# EAGLE board d150_zm1000_socket (EAGLE 6.1)
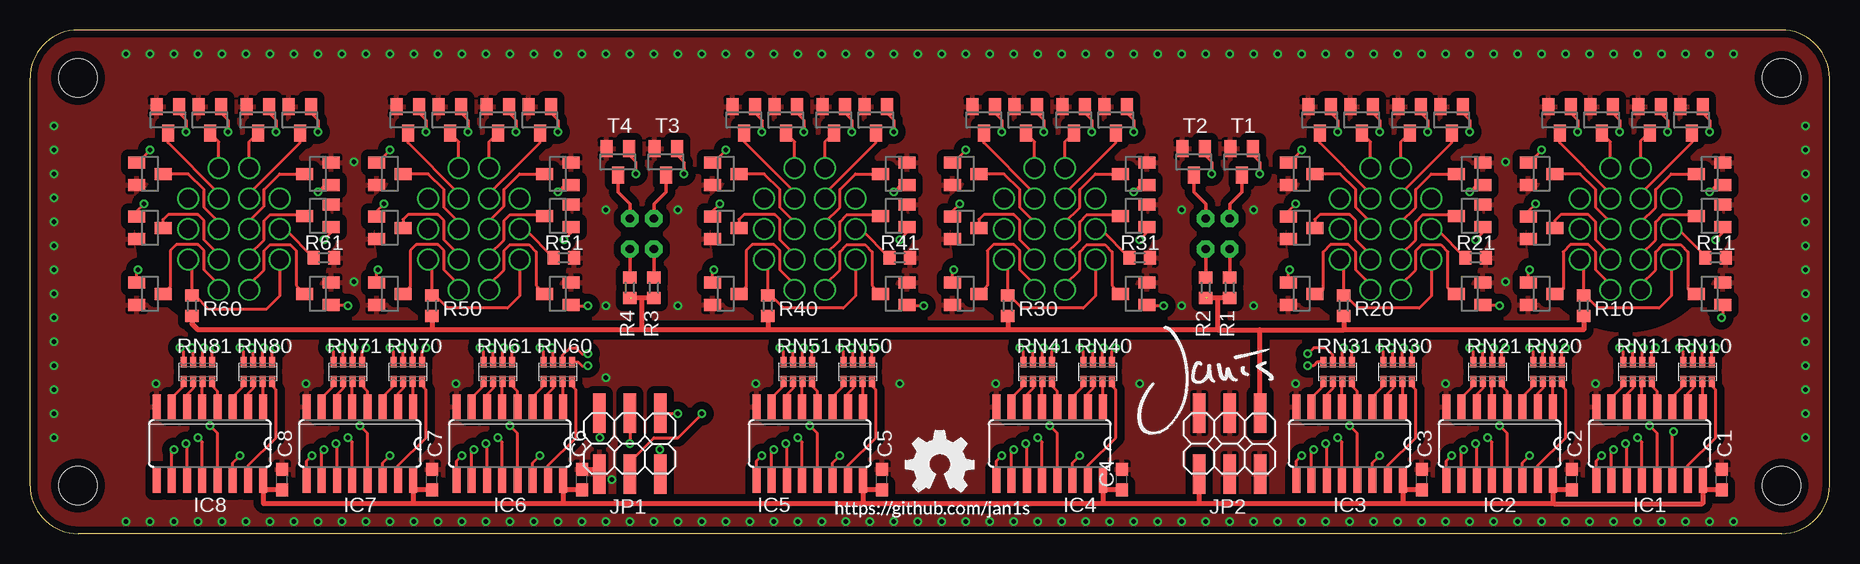
[diagram p0: board, top side]
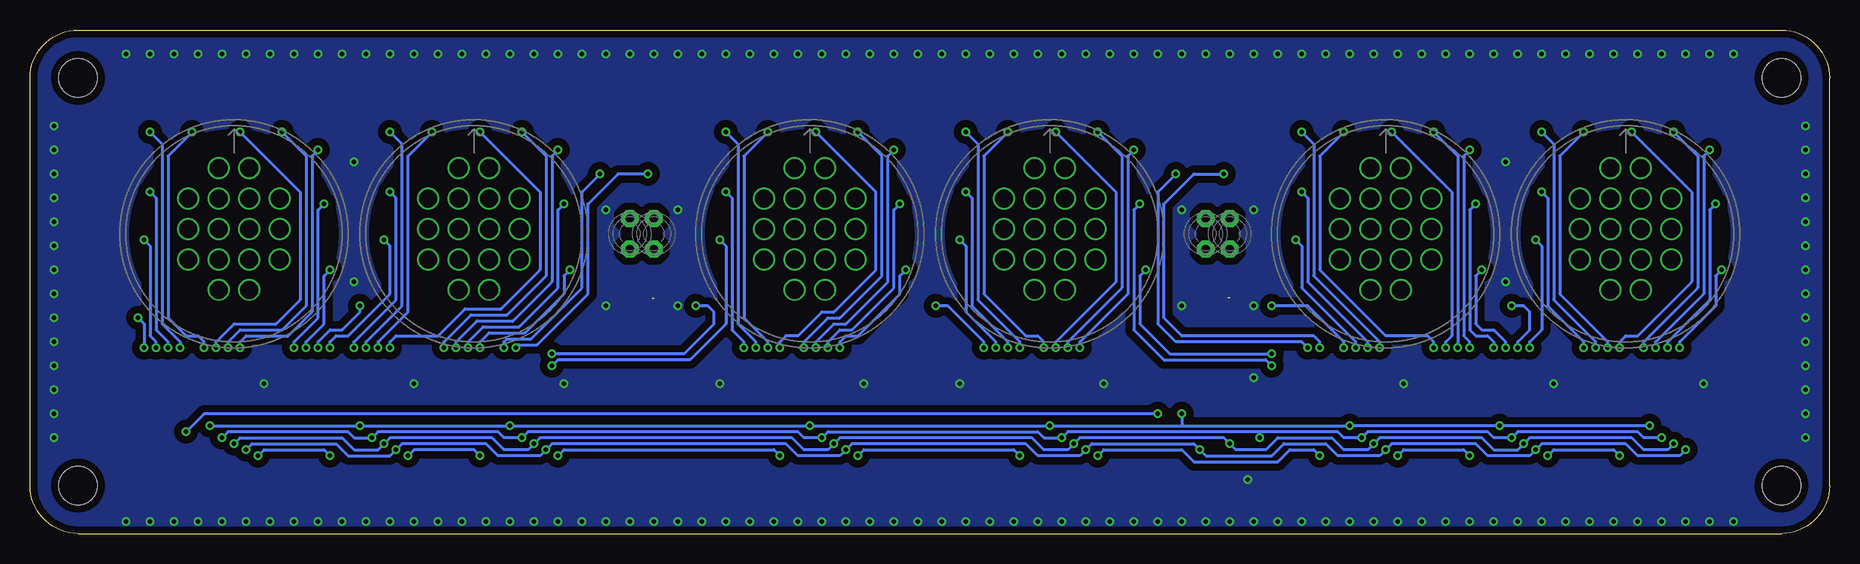
[diagram p1: board, bottom side, seen from below]

Size 150 x 42 mm. Coordinates in mm from the lower left corner, seen from the top.
Outline: 146,0 4,0 arc-90 0,4 0,38 arc-90 4,42 146,42 arc-90 150,38 150,4 arc-90 146,0
Copper layers (1*16): Top 0.035mm / dielectric 1.5mm / Bottom 0.035mm
Design rules: minimum track width 6mil, minimum drill 12mil, track to track 6mil, track to pad 6mil, pad to pad 6mil, via to via 6mil, smd to smd 0mil, copper to edge 10mil, drill to drill 10mil, minimum pad ring 6mil, minimum via ring 6mil, stop-mask expansion 2mil, vias tented up to drill 100mil, thermal gap 10mil
Holes 3.2 mm at 146,4 146,38 4,38 4,4
tRestrict: area 57.5,17.5 to 72.5,32.5; area 77.5,17.5 to 92.5,32.5; area 105.5,17.5 to 120.5,32.5; area 125.5,17.5 to 140.5,32.5; area 29.5,17.5 to 44.5,32.5; area 9.5,17.5 to 24.5,32.5
bRestrict: area 57,17 to 73,33; area 77,17 to 93,33; area 105,17 to 121,33; area 125,17 to 141,33; area 29,17 to 45,33; area 9,17 to 25,33

## Footprints (pad centres in the part's own frame; a part is rotated, then mirrored left to right if it is on the bottom)
C0603 = smd 1.1 x 1: 1 -0.85,0; 2 0.85,0
NE2-NEON-BULB-DRILL = drill 0.7 pad 1.422 octagon: 1 0,1.27; 2 0,-1.27
SO16 = smd 0.66 x 2.032: 1 -4.445,-3.073; 2 -3.175,-3.073; 3 -1.905,-3.073; 4 -0.635,-3.073; 5 0.635,-3.073; 6 1.905,-3.073; 7 3.175,-3.073; 8 4.445,-3.073; 9 4.445,3.073; 10 3.175,3.073; 11 1.905,3.073; 12 0.635,3.073; 13 -0.635,3.073; 14 -1.905,3.073; 15 -3.175,3.073; 16 -4.445,3.073
2X03SMD = smd 1.016 x 3.302: 1 -2.54,-2.54; 2 -2.54,2.54; 3 0,-2.54; 4 0,2.54; 5 2.54,-2.54; 6 2.54,2.54
ZM1000-SOCKETED = drill 1.5 pad 1.8: A1 -3.81,-2.14; A2 3.81,-2.14; IC1 -3.81,2.94; IC2 3.81,2.94; K0 1.27,0.4; K1 -1.27,5.48; K2 -1.27,2.94; K3 -1.27,0.4; K4 -1.27,-2.14; K5 -1.27,-4.68; K6 1.27,-4.68; K7 1.27,-2.14; K8 1.27,5.48; K9 1.27,2.94; KDP 3.81,0.4; PR -3.81,0.4
R0603 = smd 1 x 1.1: 1 -0.85,0; 2 0.85,0
CTS742C083 = smd 0.5 x 0.9: 1 -1.2,-0.8; 2 -0.4,-0.8; 3 0.4,-0.8; 4 1.2,-0.8; 5 1.2,0.8; 6 0.4,0.8; 7 -0.4,0.8; 8 -1.2,0.8
SOT23 = smd 1 x 1.4: 1 -0.95,-1.1; 2 0.95,-1.1; 3 0,1.1

## Placement (x,y rotation side)
C1  [C0603]  141,4.5 90 top
C2  [C0603]  128.5,4.5 90 top
C3  [C0603]  116,4.5 90 top
C4  [C0603]  91,4.5 90 top
C5  [C0603]  71,4.5 90 top
C6  [C0603]  46,4.5 90 top
C7  [C0603]  33.5,4.5 90 top
C8  [C0603]  21,4.5 90 top
GL1  [NE2-NEON-BULB-DRILL]  100,25 180 bottom
GL2  [NE2-NEON-BULB-DRILL]  98,25 180 bottom
GL3  [NE2-NEON-BULB-DRILL]  52,25 180 bottom
GL4  [NE2-NEON-BULB-DRILL]  50,25 180 bottom
IC1  74HC595D  [SO16]  135,7.5 180 top
IC2  74HC595D  [SO16]  122.5,7.5 180 top
IC3  74HC595D  [SO16]  110,7.5 180 top
IC4  74HC595D  [SO16]  85,7.5 180 top
IC5  74HC595D  [SO16]  65,7.5 180 top
IC6  74HC595D  [SO16]  40,7.5 180 top
IC7  74HC595D  [SO16]  27.5,7.5 180 top
IC8  74HC595D  [SO16]  15,7.5 180 top
JP1  [2X03SMD]  50,7.5 180 top
JP2  [2X03SMD]  100,7.5 180 top
N1  ZM1000-SOCKETED  [ZM1000-SOCKETED]  133,25 0 bottom
N2  ZM1000-SOCKETED  [ZM1000-SOCKETED]  113,25 0 bottom
N3  ZM1000-SOCKETED  [ZM1000-SOCKETED]  85,25 0 bottom
N4  ZM1000-SOCKETED  [ZM1000-SOCKETED]  65,25 0 bottom
N5  ZM1000-SOCKETED  [ZM1000-SOCKETED]  37,25 0 bottom
N6  ZM1000-SOCKETED  [ZM1000-SOCKETED]  17,25 0 bottom
R1  [R0603]  100,20.5 270 top
R2  [R0603]  98,20.5 270 top
R3  [R0603]  52,20.5 270 top
R4  [R0603]  50,20.5 270 top
R10  [R0603]  129.5,19 270 top
R11  [R0603]  140.5,23 180 top
R20  [R0603]  109.5,19 270 top
R21  [R0603]  120.5,23 180 top
R30  [R0603]  81.5,19 270 top
R31  [R0603]  92.5,23 180 top
R40  [R0603]  61.5,19 270 top
R41  [R0603]  72.5,23 180 top
R50  [R0603]  33.5,19 270 top
R51  [R0603]  44.5,23 180 top
R60  [R0603]  13.5,19 270 top
R61  [R0603]  24.5,23 180 top
RN10  10k  [CTS742C083]  139,13.5 0 top
RN11  10k  [CTS742C083]  134,13.5 0 top
RN20  10k  [CTS742C083]  126.5,13.5 0 top
RN21  10k  [CTS742C083]  121.5,13.5 0 top
RN30  10k  [CTS742C083]  114,13.5 0 top
RN31  10k  [CTS742C083]  109,13.5 0 top
RN40  10k  [CTS742C083]  89,13.5 0 top
RN41  10k  [CTS742C083]  84,13.5 0 top
RN50  10k  [CTS742C083]  69,13.5 0 top
RN51  10k  [CTS742C083]  64,13.5 0 top
RN60  10k  [CTS742C083]  44,13.5 0 top
RN61  10k  [CTS742C083]  39,13.5 0 top
RN70  10k  [CTS742C083]  31.5,13.5 0 top
RN71  10k  [CTS742C083]  26.5,13.5 0 top
RN80  10k  [CTS742C083]  19,13.5 0 top
RN81  10k  [CTS742C083]  14,13.5 0 top
T1  [SOT23]  101,31 180 top
T2  [SOT23]  97,31 180 top
T3  [SOT23]  53,31 180 top
T4  [SOT23]  49,31 180 top
T10  [SOT23]  126,30 270 top
T11  [SOT23]  135,34.5 180 top
T12  [SOT23]  138.5,34.5 180 top
T13  [SOT23]  140,30 90 top
T14  [SOT23]  140,26.5 90 top
T15  [SOT23]  140,20 90 top
T16  [SOT23]  126,20 270 top
T17  [SOT23]  126,25.5 270 top
T18  [SOT23]  131,34.5 180 top
T19  [SOT23]  127.5,34.5 180 top
T20  [SOT23]  106,30 270 top
T21  [SOT23]  115,34.5 180 top
T22  [SOT23]  118.5,34.5 180 top
T23  [SOT23]  120,30 90 top
T24  [SOT23]  120,26.5 90 top
T25  [SOT23]  120,20 90 top
T26  [SOT23]  106,20 270 top
T27  [SOT23]  106,25.5 270 top
T28  [SOT23]  111,34.5 180 top
T29  [SOT23]  107.5,34.5 180 top
T30  [SOT23]  78,30 270 top
T31  [SOT23]  87,34.5 180 top
T32  [SOT23]  90.5,34.5 180 top
T33  [SOT23]  92,30 90 top
T34  [SOT23]  92,26.5 90 top
T35  [SOT23]  92,20 90 top
T36  [SOT23]  78,20 270 top
T37  [SOT23]  78,25.5 270 top
T38  [SOT23]  83,34.5 180 top
T39  [SOT23]  79.5,34.5 180 top
T40  [SOT23]  58,30 270 top
T41  [SOT23]  67,34.5 180 top
T42  [SOT23]  70.5,34.5 180 top
T43  [SOT23]  72,30 90 top
T44  [SOT23]  72,26.5 90 top
T45  [SOT23]  72,20 90 top
T46  [SOT23]  58,20 270 top
T47  [SOT23]  58,25.5 270 top
T48  [SOT23]  63,34.5 180 top
T49  [SOT23]  59.5,34.5 180 top
T50  [SOT23]  30,30 270 top
T51  [SOT23]  39,34.5 180 top
T52  [SOT23]  42.5,34.5 180 top
T53  [SOT23]  44,30 90 top
T54  [SOT23]  44,26.5 90 top
T55  [SOT23]  44,20 90 top
T56  [SOT23]  30,20 270 top
T57  [SOT23]  30,25.5 270 top
T58  [SOT23]  35,34.5 180 top
T59  [SOT23]  31.5,34.5 180 top
T60  [SOT23]  10,30 270 top
T61  [SOT23]  19,34.5 180 top
T62  [SOT23]  22.5,34.5 180 top
T63  [SOT23]  24,30 90 top
T64  [SOT23]  24,26.5 90 top
T65  [SOT23]  24,20 90 top
T66  [SOT23]  10,20 270 top
T67  [SOT23]  10,25.5 270 top
T68  [SOT23]  15,34.5 180 top
T69  [SOT23]  11.5,34.5 180 top
U$1  [GITHUB/JAN1S]  67,1.5 0 top
U$2  [JANIS_10MM]  92,8 0 top
U$3  [OSHW_FILLX200_NOTEXT]  73,3.5 0 top

## Library data of the parts
C1-C8 R1-R4 R10 R11 R20 R21 R30 R31 R40 R41 R50 R51 R60 R61 = rcl
GL1-GL4 = nixie_tube
IC1-IC8 = 74xx-eu
JP1 JP2 = con-pinhead
N1-N6 = nixietubes-western
RN10 RN11 RN20 RN21 RN30 RN31 RN40 RN41 RN50 RN51 RN60 RN61 RN70 RN71 RN80 RN81 = resistor-net; OC_FARNELL: unknown; OC_NEWARK: unknown
T1-T4 T10-T69 = transistor-hv
U$1 U$2 = pcb-artwork
U$3 = ohw-logo

## Nets
1A: IC1.15 RN10.4
1B: IC1.1 RN10.3
1B0: RN11.8 T10.1
1B1: RN11.5 T11.1
1B2: RN10.8 T12.1
1B3: RN10.7 T13.1
1B4: RN10.6 T14.1
1B5: RN10.5 T15.1
1B6: RN20.6 T16.1
1B7: RN20.5 T17.1
1B8: RN11.6 T18.1
1B9: RN11.7 T19.1
1C: IC1.2 RN10.2
1D: IC1.3 RN10.1
1E: IC1.4 RN11.4
1F: IC1.5 RN11.3
1G: IC1.6 RN11.2
1H: IC1.7 RN11.1
2A: IC2.15 RN20.4
2B: IC2.1 RN20.3
2B0: RN30.6 T20.1
2B1: RN21.7 T21.1
2B2: RN21.6 T22.1
2B3: RN21.5 T23.1
2B4: RN20.8 T24.1
2B5: RN20.7 T25.1
2B6: RN30.8 T26.1
2B7: RN30.7 T27.1
2B8: RN21.8 T28.1
2B9: RN30.5 T29.1
2C: IC2.2 RN20.2
2D: IC2.3 RN20.1
2E: IC2.4 RN21.4
2F: IC2.5 RN21.3
2G: IC2.6 RN21.2
2H: IC2.7 RN21.1
3A: IC3.15 RN30.4
3B: IC3.1 RN30.3
3B0: RN41.6 T30.1
3B1: RN40.7 T31.1
3B2: RN40.6 T32.1
3B3: RN40.5 T33.1
3B4: RN31.8 T34.1
3B5: RN31.7 T35.1
3B6: RN41.8 T36.1
3B7: RN41.7 T37.1
3B8: RN40.8 T38.1
3B9: RN41.5 T39.1
3C: IC3.2 RN30.2
3D: IC3.3 RN30.1
3E: IC3.4 RN31.4
3F: IC3.5 RN31.3
3G: IC3.6 RN31.2
3H: IC3.7 RN31.1
4A: IC4.15 RN40.4
4B: IC4.1 RN40.3
4B0: RN51.8 T40.1
4B1: RN51.5 T41.1
4B2: RN50.8 T42.1
4B3: RN50.7 T43.1
4B4: RN50.6 T44.1
4B5: RN50.5 T45.1
4B6: RN60.6 T46.1
4B7: RN60.5 T47.1
4B8: RN51.6 T48.1
4B9: RN51.7 T49.1
4C: IC4.2 RN40.2
4C0: N4.K0 T40.3
4C1: N4.K1 T41.3
4C2: N4.K2 T42.3
4C3: N4.K3 T43.3
4C4: N4.K4 T44.3
4C5: N4.K5 T45.3
4C6: N4.K6 T46.3
4C7: N4.K7 T47.3
4C8: N4.K8 T48.3
4C9: N4.K9 T49.3
4D: IC4.3 RN40.1
4E: IC4.4 RN41.4
4F: IC4.5 RN41.3
4G: IC4.6 RN41.2
4H: IC4.7 RN41.1
5A: IC5.15 RN50.4
5B: IC5.1 RN50.3
5B0: RN70.8 T50.1
5B1: RN70.5 T51.1
5B2: RN61.8 T52.1
5B3: RN61.7 T53.1
5B4: RN61.6 T54.1
5B5: RN61.5 T55.1
5B6: RN71.6 T56.1
5B7: RN71.5 T57.1
5B8: RN70.6 T58.1
5B9: RN70.7 T59.1
5C: IC5.2 RN50.2
5C0: N5.K0 T50.3
5C1: N5.K1 T51.3
5C2: N5.K2 T52.3
5C3: N5.K3 T53.3
5C4: N5.K4 T54.3
5C5: N5.K5 T55.3
5C6: N5.K6 T56.3
5C7: N5.K7 T57.3
5C8: N5.K8 T58.3
5C9: N5.K9 T59.3
5D: IC5.3 RN50.1
5E: IC5.4 RN51.4
5F: IC5.5 RN51.3
5G: IC5.6 RN51.2
5H: IC5.7 RN51.1
6A: IC6.15 RN60.4
6B: IC6.1 RN60.3
6B0: RN81.6 T60.1
6B1: RN80.7 T61.1
6B2: RN80.6 T62.1
6B3: RN80.5 T63.1
6B4: RN71.8 T64.1
6B5: RN71.7 T65.1
6B6: RN81.8 T66.1
6B7: RN81.7 T67.1
6B8: RN80.8 T68.1
6B9: RN81.5 T69.1
6C: IC6.2 RN60.2
6C0: N6.K0 T60.3
6C1: N6.K1 T61.3
6C2: N6.K2 T62.3
6C3: N6.K3 T63.3
6C4: N6.K4 T64.3
6C5: N6.K5 T65.3
6C6: N6.K6 T66.3
6C7: N6.K7 T67.3
6C8: N6.K8 T68.3
6C9: N6.K9 T69.3
6D: IC6.3 RN60.1
6E: IC6.4 RN61.4
6F: IC6.5 RN61.3
6G: IC6.6 RN61.2
6H: IC6.7 RN61.1
7A: IC7.15 RN70.4
7B: IC7.1 RN70.3
7C: IC7.2 RN70.2
7D: IC7.3 RN70.1
7E: IC7.4 RN71.4
7F: IC7.5 RN71.3
7G: IC7.6 RN71.2
7H: IC7.7 RN71.1
8A: IC8.15 RN80.4
8B: IC8.1 RN80.3
8C: IC8.2 RN80.2
8D: IC8.3 RN80.1
8E: IC8.4 RN81.4
8F: IC8.5 RN81.3
8G: IC8.6 RN81.2
8H: IC8.7 RN81.1
+5V: C1.1 C2.1 C3.1 C4.1 C5.1 C6.1 C7.1 C8.1 IC1.16 IC2.16 IC3.16 IC4.16 IC5.16 IC6.16 IC7.16 IC8.16 JP2.6
EN: IC1.13 IC2.13 IC3.13 IC4.13 IC5.13 IC6.13 IC7.13 IC8.13 JP1.1
GL1: RN31.5 T1.1
GL2: RN31.6 T2.1
GL3: RN60.7 T3.1
GL4: RN60.8 T4.1
GND: C1.2 C2.2 C3.2 C4.2 C5.2 C6.2 C7.2 C8.2 IC1.8 IC2.8 IC3.8 IC4.8 IC5.8 IC6.8 IC7.8 IC8.8 JP1.6 JP2.2 JP2.3 JP2.4 JP2.5 R11.1 R21.1 R31.1 R41.1 R51.1 R61.1 T1.2 T2.2 T3.2 T4.2 T10.2 T11.2 T12.2 T13.2 T14.2 T15.2 T16.2 T17.2 T18.2 T19.2 T20.2 T21.2 T22.2 T23.2 T24.2 T25.2 T26.2 T27.2 T28.2 T29.2 T30.2 T31.2 T32.2 T33.2 T34.2 T35.2 T36.2 T37.2 T38.2 T39.2 T40.2 T41.2 T42.2 T43.2 T44.2 T45.2 T46.2 T47.2 T48.2 T49.2 T50.2 T51.2 T52.2 T53.2 T54.2 T55.2 T56.2 T57.2 T58.2 T59.2 T60.2 T61.2 T62.2 T63.2 T64.2 T65.2 T66.2 T67.2 T68.2 T69.2
MOSI: IC1.14 JP1.4
N1_0: N1.K0 T10.3
N1_1: N1.K1 T11.3
N1_2: N1.K2 T12.3
N1_3: N1.K3 T13.3
N1_4: N1.K4 T14.3
N1_5: N1.K5 T15.3
N1_6: N1.K6 T16.3
N1_7: N1.K7 T17.3
N1_8: N1.K8 T18.3
N1_9: N1.K9 T19.3
N1_DP: N1.KDP
N1_PR: N1.PR R11.2
N2_0: N2.K0 T20.3
N2_1: N2.K1 T21.3
N2_2: N2.K2 T22.3
N2_3: N2.K3 T23.3
N2_4: N2.K4 T24.3
N2_5: N2.K5 T25.3
N2_6: N2.K6 T26.3
N2_7: N2.K7 T27.3
N2_8: N2.K8 T28.3
N2_9: N2.K9 T29.3
N3_0: N3.K0 T30.3
N3_1: N3.K1 T31.3
N3_2: N3.K2 T32.3
N3_3: N3.K3 T33.3
N3_4: N3.K4 T34.3
N3_5: N3.K5 T35.3
N3_6: N3.K6 T36.3
N3_7: N3.K7 T37.3
N3_8: N3.K8 T38.3
N3_9: N3.K9 T39.3
N$1: GL2.1 R2.1
N$2: GL3.1 R3.1
N$3: GL4.1 R4.1
N$4: N1.A1 N1.A2 R10.1
N$5: GL2.2 T2.3
N$6: GL1.2 T1.3
N$7: GL4.2 T4.3
N$8: GL3.2 T3.3
N$9: N2.A1 N2.A2 R20.1
N$10: IC1.9 IC2.14
N$11: IC2.9 IC3.14
N$12: IC3.9 IC4.14
N$13: N3.A1 N3.A2 R30.1
N$14: N4.A1 N4.A2 R40.1
N$15: N5.A1 N5.A2 R50.1
N$16: IC4.9 IC5.14
N$17: N6.A1 N6.A2 R60.1
N$18: IC5.9 IC6.14
N$19: IC6.9 IC7.14
N$20: IC7.9 IC8.14
N$21: GL1.1 R1.1
N$25: N6.PR R61.2
N$26: N3.PR R31.2
N$27: N2.PR R21.2
N$28: N5.PR R51.2
N$29: N4.PR R41.2
RCK: IC1.12 IC2.12 IC3.12 IC4.12 IC5.12 IC6.12 IC7.12 IC8.12 JP1.5
SCK: IC1.11 IC2.11 IC3.11 IC4.11 IC5.11 IC6.11 IC7.11 IC8.11 JP1.3
SCL: IC1.10 IC2.10 IC3.10 IC4.10 IC5.10 IC6.10 IC7.10 IC8.10 JP1.2
VDD: JP2.1 R1.2 R2.2 R3.2 R4.2 R10.2 R20.2 R30.2 R40.2 R50.2 R60.2

## Tracks (layer width: path | path; a pad name or v marks a point on that pad's centre or on a via)
1A
  Top 0.254: IC1.15 138.18,5.67 140.5,8 140.5,12 140.2,12.3 RN10.4
1B
  Top 0.254: IC1.1 139.44,12.65 RN10.3
1B0  (via drill 0.4)
  Top 0.254: RN11.8 132.8,15.2 v132.5,15.5 | T10.1 124.95,30.95 v126,32
  Bottom 0.254: v132.5,15.5 132.5,16 132,16.5 128.5,16.5 126.5,18.5 126.5,31.5 v126,32
1B1  (via drill 0.4)
  Top 0.254: T11.1 135.95,35.05 136.5,34.5 v136.5,33.5 | RN11.5 135.2,15.2 v135.5,15.5
  Bottom 0.254: v136.5,33.5 138.5,31.5 138.5,18 137,16.5 136,16.5 135.5,16 v135.5,15.5
1B2  (via drill 0.4)
  Top 0.254: T12.1 139.45,35.05 140,34.5 v140,33.5 | RN10.8 137.8,15.2 v137.5,15.5
  Bottom 0.254: v140,33.5 139,32.5 139,17.5 137.5,16 v137.5,15.5
1B3  (via drill 0.4)
  Top 0.254: RN10.7 138.6,15.4 v138.5,15.5 | T13.1 140.55,29.05 v140,28.5
  Bottom 0.254: v138.5,15.5 138.5,16 139.5,17 139.5,28 v140,28.5
1B4  (via drill 0.4)
  Top 0.254: RN10.6 139.4,15.4 v139.5,15.5 | T14.1 141.1,25.1 v140.5,24.5
  Bottom 0.254: v139.5,15.5 139.5,16 140,16.5 140,24 v140.5,24.5
1B5  (via drill 0.4)
  Top 0.254: RN10.5 140.2,15.2 v140.5,15.5 | T15.1 141.1,18.1 v141,18
  Bottom 0.254: v141,18 140.5,17.5 v140.5,15.5
1B6  (via drill 0.4)
  Top 0.254: RN20.6 126.9,15.4 v127,15.5 | T16.1 124.9,21.9 v125,22
  Bottom 0.254: v127,15.5 127,16 125.5,17.5 125.5,21.5 v125,22
1B7  (via drill 0.4)
  Top 0.254: RN20.5 127.7,15.2 v128,15.5 | T17.1 124.9,26.9 v125.5,27.5
  Bottom 0.254: v125.5,27.5 126,27 126,18 128,16 v128,15.5
1B8  (via drill 0.4)
  Top 0.254: T18.1 131.95,35.05 132.5,34.5 v132.5,33.5 | RN11.6 134.4,15.4 v134.5,15.5
  Bottom 0.254: v132.5,33.5 127.5,28.5 127.5,19.5 129.5,17.5 133,17.5 134.5,16 v134.5,15.5
1B9  (via drill 0.4)
  Top 0.254: T19.1 128.45,35.05 129,34.5 v129,33.5 | RN11.7 133.6,15.4 v133.5,15.5
  Bottom 0.254: v129,33.5 127,31.5 127,19 129,17 132.5,17 133.5,16 v133.5,15.5
1C
  Top 0.254: IC1.2 138.18,11.68 138.6,12.1 RN10.2
1D
  Top 0.254: IC1.3 136.91,11.4 137.8,12.3 RN10.1
1E
  Top 0.254: IC1.4 135.63,11.87 135.2,12.3 RN11.4
1F
  Top 0.254: IC1.5 134.37,12.66 RN11.3
1G
  Top 0.254: IC1.6 133.09,11.6 133.6,12.1 RN11.2
1H
  Top 0.254: IC1.7 131.82,11.32 132.8,12.3 RN11.1
2A
  Top 0.254: RN20.4 127.7,12.3 128,12 128,8 125.67,5.67 IC2.15
2B
  Top 0.254: IC2.1 126.94,12.65 RN20.3
2B0  (via drill 0.4)
  Top 0.254: RN30.6 114.4,15.4 v114.5,15.5 | T20.1 104.95,30.95 v106,32
  Bottom 0.254: v114.5,15.5 114.5,16 112.75,17.75 109.75,17.75 106.5,21 106.5,31.5 v106,32
2B1  (via drill 0.4)
  Top 0.254: T21.1 115.95,35.05 116.5,34.5 v116.5,33.5 | RN21.7 121.1,15.4 v121,15.5
  Bottom 0.254: v116.5,33.5 118.5,31.5 118.5,18.5 121,16 v121,15.5
2B2  (via drill 0.4)
  Top 0.254: T22.1 119.45,35.05 120,34.5 v120,33.5 | RN21.6 121.9,15.4 v122,15.5
  Bottom 0.254: v120,33.5 119,32.5 119,19 122,16 v122,15.5
2B3  (via drill 0.4)
  Top 0.254: T23.1 120.55,29.05 v120,28.5 | RN21.5 122.7,15.2 v123,15.5
  Bottom 0.254: v123,15.5 123,16 119.5,19.5 119.5,28 v120,28.5
2B4  (via drill 0.4)
  Top 0.254: RN20.8 125.3,15.2 v125,15.5 | T24.1 121.1,25.1 v120.5,24.5
  Bottom 0.254: v125,15.5 125,16 124.5,16.5 123.5,16.5 120,20 120,24 v120.5,24.5
2B5  (via drill 0.4)
  Top 0.254: 121.1,19.1 T25.1 122.45,19.05 v122.5,19 | RN20.7 126.1,15.4 v126,15.5
  Bottom 0.254: v126,15.5 126,16 125,17 124,17 122.5,18.5 v122.5,19
2B6  (via drill 0.4)
  Top 0.254: RN30.8 112.8,15.2 v112.5,15.5 | T26.1 104.9,21.9 v105,22
  Bottom 0.254: v112.5,15.5 112.5,16 111.75,16.75 108.75,16.75 105.5,20 105.5,21.5 v105,22
2B7  (via drill 0.4)
  Top 0.254: RN30.7 113.6,15.4 v113.5,15.5 | T27.1 104.9,26.9 v105.5,27.5
  Bottom 0.254: v113.5,15.5 113.5,16 112.25,17.25 109.25,17.25 106,20.5 106,27 v105.5,27.5
2B8  (via drill 0.4)
  Top 0.254: T28.1 111.95,35.05 112.5,34.5 v112.5,33.5 | RN21.8 120.3,15.2 v120,15.5
  Bottom 0.254: v112.5,33.5 107.5,28.5 107.5,22 110.75,18.75 113.75,18.75 116,16.5 119.5,16.5 120,16 v120,15.5
2B9  (via drill 0.4)
  Top 0.254: T29.1 108.45,35.05 109,34.5 v109,33.5 | RN30.5 115.2,15.2 v115.5,15.5
  Bottom 0.254: v109,33.5 107,31.5 107,21.5 110.25,18.25 113.25,18.25 115.5,16 v115.5,15.5
2C
  Top 0.254: IC2.2 125.67,11.68 126.1,12.1 RN20.2
2D
  Top 0.254: IC2.3 124.41,11.4 125.3,12.3 RN20.1
2E
  Top 0.254: IC2.4 123.14,11.87 122.7,12.3 RN21.4
2F
  Top 0.254: IC2.5 121.86,12.66 RN21.3
2G
  Top 0.254: IC2.6 120.59,11.6 121.1,12.1 RN21.2
2H
  Top 0.254: IC2.7 119.33,11.32 120.3,12.3 RN21.1
3A
  Top 0.254: IC3.15 113.17,5.67 115.5,8 115.5,12 115.2,12.3 RN30.4
3B
  Top 0.254: IC3.1 114.44,12.65 RN30.3
3B0  (via drill 0.4)
  Top 0.254: T30.1 76.95,30.95 v78,32 | RN41.6 84.4,15.4 v84.5,15.5
  Bottom 0.254: v78,32 78.5,31.5 78.5,21 82,17.5 83,17.5 84.5,16 v84.5,15.5
3B1  (via drill 0.4)
  Top 0.254: T31.1 87.95,35.05 88.5,34.5 v88.5,33.5 | RN40.7 88.6,15.4 v88.5,15.5
  Bottom 0.254: v88.5,33.5 90.5,31.5 90.5,18 88.5,16 v88.5,15.5
3B2  (via drill 0.4)
  Top 0.254: T32.1 91.45,35.05 92,34.5 v92,33.5 | RN40.6 89.4,15.4 v89.5,15.5
  Bottom 0.254: v92,33.5 91,32.5 91,17.5 89.5,16 v89.5,15.5
3B3  (via drill 0.4)
  Top 0.254: T33.1 92.55,29.05 v92,28.5 | RN40.5 90.2,15.2 v90.5,15.5
  Bottom 0.254: v92,28.5 91.5,28 91.5,17 90.5,16 v90.5,15.5
3B4  (via drill 0.4)
  Top 0.254: T34.1 93.1,25.1 v92.5,24.5 | RN31.8 107.3,14.3 107,14 v106.5,14
  Bottom 0.254: v92.5,24.5 92,24 92,17.5 95,14.5 106,14.5 v106.5,14
3B5  (via drill 0.4)
  Top 0.254: RN31.7 108.6,14.9 108,15.5 107,15.5 v106.5,15 | v94.5,19 93.15,19 T35.1
  Bottom 0.254: v106.5,15 95.5,15 93,17.5 93,18.5 93.5,19 v94.5,19
3B6  (via drill 0.4)
  Top 0.254: T36.1 76.9,21.9 v77,22 | RN41.8 82.8,15.2 v82.5,15.5
  Bottom 0.254: v77,22 77.5,21.5 77.5,20 81,16.5 82,16.5 82.5,16 v82.5,15.5
3B7  (via drill 0.4)
  Top 0.254: T37.1 76.9,26.9 v77.5,27.5 | RN41.7 83.6,15.4 v83.5,15.5
  Bottom 0.254: v77.5,27.5 78,27 78,20.5 81.5,17 82.5,17 83.5,16 v83.5,15.5
3B8  (via drill 0.4)
  Top 0.254: T38.1 83.95,35.05 84.5,34.5 v84.5,33.5 | RN40.8 87.8,15.2 v87.5,15.5
  Bottom 0.254: v84.5,33.5 79.5,28.5 79.5,22 83,18.5 84,18.5 86,16.5 87,16.5 87.5,16 v87.5,15.5
3B9  (via drill 0.4)
  Top 0.254: T39.1 80.45,35.05 81,34.5 v81,33.5 | RN41.5 85.2,15.2 v85.5,15.5
  Bottom 0.254: v81,33.5 79,31.5 79,21.5 82.5,18 83.5,18 85.5,16 v85.5,15.5
3C
  Top 0.254: IC3.2 113.17,11.68 113.6,12.1 RN30.2
3D
  Top 0.254: IC3.3 111.91,11.4 112.8,12.3 RN30.1
3E
  Top 0.254: IC3.4 110.64,11.87 110.2,12.3 RN31.4
3F
  Top 0.254: IC3.5 109.36,12.66 RN31.3
3G
  Top 0.254: IC3.6 108.09,11.6 108.6,12.1 RN31.2
3H
  Top 0.254: IC3.7 106.83,11.32 107.8,12.3 RN31.1
4A
  Top 0.254: IC4.15 88.17,5.67 90.5,8 90.5,12 90.2,12.3 RN40.4
4B
  Top 0.254: IC4.1 89.44,12.45 89.5,12.5 89.5,12.6 RN40.3
4B0  (via drill 0.4)
  Top 0.254: T40.1 56.95,30.95 v58,32 | RN51.8 62.8,15.2 v62.5,15.5
  Bottom 0.254: v58,32 58.5,31.5 58.5,20 62.5,16 v62.5,15.5
4B1  (via drill 0.4)
  Top 0.254: T41.1 67.95,35.05 68.5,34.5 v68.5,33.5 | RN51.5 65.2,15.2 v65.5,15.5
  Bottom 0.254: v68.5,33.5 70.5,31.5 70.5,20 67,16.5 66,16.5 65.5,16 v65.5,15.5
4B2  (via drill 0.4)
  Top 0.254: T42.1 71.45,35.05 72,34.5 v72,33.5 | RN50.8 67.8,15.2 v67.5,15.5
  Bottom 0.254: v72,33.5 71,32.5 71,19.5 67.5,16 v67.5,15.5
4B3  (via drill 0.4)
  Top 0.254: T43.1 72.55,29.05 v72,28.5 | RN50.7 68.6,15.4 v68.5,15.5
  Bottom 0.254: v72,28.5 71.5,28 71.5,19 68.5,16 v68.5,15.5
4B4  (via drill 0.4)
  Top 0.254: T44.1 73.1,25.1 v72.5,24.5 | RN50.6 69.4,15.4 v69.5,15.5
  Bottom 0.254: v72.5,24.5 72,24 72,18.5 69.5,16 v69.5,15.5
4B5  (via drill 0.4)
  Top 0.254: RN50.5 70.2,15.2 v70.5,15.5 | v74.5,19 73.15,19 T45.1
  Bottom 0.254: v70.5,15.5 70.5,16 73.5,19 v74.5,19
4B6  (via drill 0.4)
  Top 0.254: T46.1 56.9,21.9 v57,22 | RN60.6 44.4,14.9 45,15.5 45.5,15.5 46,15 v46.5,15
  Bottom 0.254: v57,22 57.5,21.5 57.5,17.5 55,15 v46.5,15
4B7  (via drill 0.4)
  Top 0.254: T47.1 56.9,26.9 v57.5,27.5 | RN60.5 45.7,14.3 46,14 v46.5,14
  Bottom 0.254: v57.5,27.5 58,27 58,17 55.5,14.5 47,14.5 v46.5,14
4B8  (via drill 0.4)
  Top 0.254: T48.1 63.95,35.05 64.5,34.5 v64.5,33.5 | RN51.6 64.4,15.4 v64.5,15.5
  Bottom 0.254: v64.5,33.5 59.5,28.5 59.5,21 64.5,16 v64.5,15.5
4B9  (via drill 0.4)
  Top 0.254: T49.1 60.45,35.05 61,34.5 v61,33.5 | RN51.7 63.6,15.4 v63.5,15.5
  Bottom 0.254: v61,33.5 59,31.5 59,20.5 63.5,16 v63.5,15.5
4C
  Top 0.254: IC4.2 88.17,11.68 88.6,12.1 RN40.2
4C0
  Top 0.254: N4.K0 63.73,25.97 62.5,27.2 62.5,28.7 61.2,30 T40.3
4C1
  Top 0.254: N4.K1 66.27,32.67 T41.3
4C2
  Top 0.254: N4.K2 66.27,28.37 70.5,32.6 T42.3 70.5,33.5
4C3
  Top 0.254: N4.K3 66.27,25.97 67.5,27.2 67.5,28.7 68.8,30 T43.3
4C4
  Top 0.254: N4.K4 66.27,23.27 67.5,24.5 67.5,26 68.1,26.6 70.8,26.6 T44.3
4C5
  Top 0.254: N4.K5 66.27,20.77 67.5,22 67.5,23.5 68.1,24.1 69.6,24.1 70.2,23.5 70.2,20.7 T45.3
4C6
  Top 0.254: N4.K6 63.73,20.77 62.5,22 62.5,23.6 62,24.1 60.2,24.1 59.7,23.6 59.7,20.6 T46.3
4C7
  Top 0.254: N4.K7 63.73,23.27 62.5,24.5 62.5,26.2 62.1,26.6 59.5,26.6 59.1,26.2 T47.3
4C8
  Top 0.254: N4.K8 63.73,32.67 T48.3
4C9
  Top 0.254: N4.K9 63.73,28.47 59.5,32.7 T49.3
4D
  Top 0.254: IC4.3 86.91,11.4 87.8,12.3 RN40.1
4E
  Top 0.254: IC4.4 85.64,11.87 85.2,12.3 RN41.4
4F
  Top 0.254: IC4.5 84.36,12.66 RN41.3
4G
  Top 0.254: IC4.6 83.09,11.6 83.6,12.1 RN41.2
4H
  Top 0.254: IC4.7 81.83,11.32 82.8,12.3 RN41.1
5A
  Top 0.254: IC5.15 68.17,5.67 70.5,8 70.5,12 70.2,12.3 RN50.4
5B
  Top 0.254: IC5.1 69.44,12.65 RN50.3
5B0  (via drill 0.4)
  Top 0.254: T50.1 28.95,30.95 v30,32 | RN70.8 30.3,15.2 v30,15.5
  Bottom 0.254: v30,32 30.5,31.5 30.5,16.5 30,16 v30,15.5
5B1  (via drill 0.4)
  Top 0.254: T51.1 39.95,35.05 40.5,34.5 v40.5,33.5 | RN70.5 32.7,15.2 v33,15.5
  Bottom 0.254: v40.5,33.5 42.5,31.5 42.5,22 37,16.5 33.5,16.5 33,16 v33,15.5
5B2  (via drill 0.4)
  Top 0.254: T52.1 43.45,35.05 44,34.5 v44,33.5 | RN61.8 37.8,15.2 v37.5,15.5
  Bottom 0.254: v44,33.5 43,32.5 43,21.5 37.5,16 v37.5,15.5
5B3  (via drill 0.4)
  Top 0.254: 44.55,29.05 v44,28.5 | RN61.7 38.6,15.4 v38.5,15.5
  Top 0.305: T53.1 44.55,29.05
  Bottom 0.254: v44,28.5 43.5,28 43.5,21 38.5,16 v38.5,15.5
5B4  (via drill 0.4)
  Top 0.254: T54.1 45.1,25.1 v44.5,24.5 | RN61.6 39.4,15.4 v39.5,15.5
  Bottom 0.254: v44.5,24.5 44,24 44,20.5 39.5,16 v39.5,15.5
5B5  (via drill 0.4)
  Top 0.254: 45.1,19.1 T55.1 45.15,19 v46.5,19 | RN61.5 40.2,15.2 v40.5,15.5
  Bottom 0.254: v40.5,15.5 40.5,16 43.5,19 v46.5,19
5B6  (via drill 0.4)
  Top 0.254: T56.1 28.9,21.9 v29,22 | RN71.6 26.9,15.4 v27,15.5
  Bottom 0.254: v29,22 29.5,21.5 29.5,17.5 29,17 28,17 27,16 v27,15.5
5B7  (via drill 0.4)
  Top 0.254: T57.1 28.9,26.9 v29.5,27.5 | RN71.5 27.7,15.2 v28,15.5
  Bottom 0.254: v29.5,27.5 30,27 30,17 29.5,16.5 28.5,16.5 28,16 v28,15.5
5B8  (via drill 0.4)
  Top 0.254: T58.1 35.95,35.05 36.5,34.5 v36.5,33.5 | RN70.6 31.9,15.4 v32,15.5
  Bottom 0.254: v36.5,33.5 31.5,28.5 31.5,16.5 32,16 v32,15.5
5B9  (via drill 0.4)
  Top 0.254: T59.1 32.45,35.05 33,34.5 v33,33.5 | RN70.7 31.1,15.4 v31,15.5
  Bottom 0.254: v33,33.5 31,31.5 v31,15.5
5C
  Top 0.254: IC5.2 68.17,11.68 68.6,12.1 RN50.2
5C0
  Top 0.254: N5.K0 35.73,25.97 34.5,27.2 34.5,28.7 33.2,30 T50.3
5C1
  Top 0.254: N5.K1 38.27,32.67 T51.3
5C2
  Top 0.254: N5.K2 38.27,28.37 42.5,32.6 T52.3
5C3
  Top 0.254: N5.K3 38.27,26.07 39.5,27.3 39.5,28.7 40.8,30 T53.3
5C4
  Top 0.254: N5.K4 38.27,23.27 39.5,24.5 39.5,26.1 40,26.6 42.9,26.6 43,26.5 T54.3
5C5
  Top 0.254: N5.K5 38.27,20.77 39.5,22 39.5,23.6 40,24.1 41.6,24.1 42.2,23.5 42.2,20.7 T55.3
5C6
  Top 0.254: N5.K6 35.73,20.77 34.5,22 34.5,23.6 34,24.1 32.2,24.1 31.7,23.6 31.7,20.6 T56.3
5C7
  Top 0.254: N5.K7 35.73,23.27 34.5,24.5 34.5,26.1 34,26.6 31.5,26.6 31.1,26.2 T57.3
5C8
  Top 0.254: N5.K8 35.73,32.67 T58.3
5C9
  Top 0.254: N5.K9 35.73,28.37 31.5,32.6 T59.3
5D
  Top 0.254: IC5.3 66.91,11.4 67.8,12.3 RN50.1
5E
  Top 0.254: IC5.4 65.64,11.87 65.2,12.3 RN51.4
5F
  Top 0.254: IC5.5 64.36,12.66 RN51.3
5G
  Top 0.254: IC5.6 63.09,11.6 63.6,12.1 RN51.2
5H
  Top 0.254: IC5.7 61.83,11.32 62.8,12.3 RN51.1
6A
  Top 0.254: IC6.15 43.17,5.67 45.5,8 45.5,12 45.2,12.3 RN60.4
6B
  Top 0.254: IC6.1 44.45,12.65 RN60.3
6B0  (via drill 0.4)
  Top 0.254: T60.1 8.95,30.95 v10,32 | RN81.6 14.4,15.4 v14.5,15.5
  Bottom 0.254: v10,32 10.5,31.5 10.5,20 14.5,16 v14.5,15.5
6B1  (via drill 0.4)
  Top 0.254: T61.1 19.95,35.05 20.5,34.5 v20.5,33.5 | RN80.7 18.6,15.4 v18.5,15.5
  Bottom 0.254: v20.5,33.5 22.5,31.5 22.5,20 18.5,16 v18.5,15.5
6B2  (via drill 0.4)
  Top 0.254: T62.1 23.45,35.05 24,34.5 v24,33.5 | RN80.6 19.4,15.4 v19.5,15.5
  Bottom 0.254: v24,33.5 23,32.5 23,19.5 19.5,16 v19.5,15.5
6B3  (via drill 0.4)
  Top 0.254: T63.1 24.55,29.05 v24,28.5 | RN80.5 20.2,15.2 v20.5,15.5
  Bottom 0.254: v24,28.5 23.5,28 23.5,19 20.5,16 v20.5,15.5
6B4  (via drill 0.4)
  Top 0.254: T64.1 25.1,25.1 v24.5,24.5 | RN71.8 25.3,15.2 v25,15.5
  Bottom 0.254: v24.5,24.5 24,24 24,17 25,16 v25,15.5
6B5  (via drill 0.4)
  Top 0.254: RN71.7 26.1,15.4 v26,15.5 | T65.1 26.45,19.05 v26.5,19
  Bottom 0.254: v26,15.5 26,16 25,17 25,18.5 25.5,19 v26.5,19
6B6  (via drill 0.4)
  Top 0.254: T66.1 8.9,21.9 v9,22 | RN81.8 12.8,15.2 v12.5,15.5
  Bottom 0.254: v9,22 9.5,21.5 9.5,19 12.5,16 v12.5,15.5
6B7  (via drill 0.4)
  Top 0.254: T67.1 8.9,26.9 v9.5,27.5 | RN81.7 13.6,15.4 v13.5,15.5
  Bottom 0.254: v9.5,27.5 10,27 10,19.5 13.5,16 v13.5,15.5
6B8  (via drill 0.4)
  Top 0.254: T68.1 15.95,35.05 16.5,34.5 v16.5,33.5 | RN80.8 17.8,15.2 v17.5,15.5
  Bottom 0.254: v16.5,33.5 11.5,28.5 11.5,21 16,16.5 17,16.5 17.5,16 v17.5,15.5
6B9  (via drill 0.4)
  Top 0.254: T69.1 12.45,35.05 13,34.5 v13,33.5 | RN81.5 15.2,15.2 v15.5,15.5
  Bottom 0.254: v13,33.5 11,31.5 11,20.5 15.5,16 v15.5,15.5
6C
  Top 0.254: IC6.2 43.17,11.68 43.6,12.1 RN60.2
6C0
  Top 0.254: N6.K0 15.73,25.97 14.5,27.2 14.5,28.7 13.2,30 T60.3
6C1
  Top 0.254: N6.K1 18.27,32.67 T61.3
6C2
  Top 0.254: N6.K2 18.27,28.37 22.5,32.6 T62.3
6C3
  Top 0.254: N6.K3 18.27,26.07 19.5,27.3 19.5,28.7 20.8,30 T63.3
6C4
  Top 0.254: N6.K4 18.27,23.27 19.5,24.5 19.5,26.1 20,26.6 22.8,26.6 T64.3
6C5
  Top 0.254: N6.K5 18.27,20.77 19.5,22 19.5,23.6 20,24.1 21.7,24.1 22.2,23.6 22.2,20.7 T65.3
6C6
  Top 0.254: N6.K6 15.73,20.77 14.5,22 14.5,23.6 14,24.1 12.2,24.1 11.7,23.6 11.7,20.6 T66.3
6C7
  Top 0.254: N6.K7 15.73,23.27 14.5,24.5 14.5,26.1 14,26.6 11.5,26.6 11.1,26.2 T67.3
6C8
  Top 0.254: N6.K8 15.73,32.67 T68.3
6C9
  Top 0.254: N6.K9 15.73,28.37 11.5,32.6 T69.3
6D
  Top 0.254: IC6.3 41.91,11.4 42.8,12.3 RN60.1
6E
  Top 0.254: IC6.4 40.63,11.87 40.2,12.3 RN61.4
6F
  Top 0.254: IC6.5 39.37,12.66 RN61.3
6G
  Top 0.254: IC6.6 38.09,11.6 38.6,12.1 RN61.2
6H
  Top 0.254: IC6.7 36.83,11.32 37.8,12.3 RN61.1
7A
  Top 0.254: IC7.15 30.68,5.67 33,8 33,12 32.7,12.3 RN70.4
7B
  Top 0.254: IC7.1 31.95,12.65 RN70.3
7C
  Top 0.254: IC7.2 30.68,11.68 31.1,12.1 RN70.2
7D
  Top 0.254: IC7.3 29.41,11.4 30.3,12.3 RN70.1
7E
  Top 0.254: IC7.4 28.14,11.87 27.7,12.3 RN71.4
7F
  Top 0.254: IC7.5 26.86,12.66 RN71.3
7G
  Top 0.254: IC7.6 25.59,11.6 26.1,12.1 RN71.2
7H
  Top 0.254: IC7.7 24.32,11.32 25.3,12.3 RN71.1
8A
  Top 0.254: IC8.15 18.18,5.67 20.5,8 20.5,12 20.2,12.3 RN80.4
8B
  Top 0.254: IC8.1 19.45,12.65 RN80.3
8C
  Top 0.254: IC8.2 18.18,11.68 18.6,12.1 RN80.2
8D
  Top 0.254: IC8.3 16.91,11.4 17.8,12.3 RN80.1
8E
  Top 0.254: IC8.4 15.63,11.87 15.2,12.3 RN81.4
8F
  Top 0.254: IC8.5 14.37,12.66 RN81.3
8G
  Top 0.254: IC8.6 13.1,11.6 13.6,12.1 RN81.2
8H
  Top 0.254: IC8.7 11.82,11.32 12.8,12.3 RN81.1
+5V
  Top 0.406: IC1.16 139.44,3.5 | 139.44,3.5 139.44,2.56 139.39,2.5 127,2.5 | 127,2.5 114.5,2.5 | 114.5,2.5 97.5,2.5 | 97.5,2.5 89.5,2.5 | 89.5,2.5 69.5,2.5 | 69.5,2.5 44.5,2.5 | 44.5,2.5 32,2.5 | 32,2.5 19.5,2.5 19.45,2.56 19.45,3.5 | IC8.16 19.45,3.5 | IC2.16 126.94,3.5 | 126.94,3.5 126.94,2.56 127,2.5 | IC4.16 89.44,3.5 | 89.44,3.5 89.44,2.56 89.5,2.5 | IC5.16 69.44,3.5 | 69.44,3.5 69.44,2.56 69.5,2.5 | IC6.16 44.45,3.5 | 44.45,3.5 44.45,2.56 44.5,2.5 | IC7.16 31.95,3.5 | 31.95,3.5 31.95,2.56 32,2.5 | JP2.6 97.46,2.54 97.5,2.54 97.5,2.5 | C8.1 19.59,3.65 19.45,3.5 | C7.1 32.09,3.65 31.95,3.5 | C6.1 44.59,3.65 44.45,3.5 | C5.1 69.59,3.65 69.44,3.5 | C4.1 89.59,3.65 89.44,3.5 | IC3.16 114.44,3.5 | 114.44,3.5 114.44,2.56 114.5,2.5 | C3.1 114.59,3.65 114.44,3.5 | C2.1 127.09,3.65 126.94,3.5 | C1.1 139.59,3.65 139.44,3.5
EN  (via drill 0.4)
  Top 0.254: IC1.13 135.63,8.37 v135,9 | IC2.13 123.14,8.37 v122.5,9 | IC3.13 110.64,8.37 v110,9 | v85,9 85.64,8.37 IC4.13 | v65,9 65.64,8.37 IC5.13 | v40,9 40.63,8.37 IC6.13 | IC7.13 28.14,8.37 v27.5,9 | IC8.13 15.63,8.37 v15,9 | JP1.1 53.96,10.04 v54,10
  Bottom 0.254: v135,9 v122.5,9 v110,9 v85,9 v65,9 54,9 | v15,9 v27.5,9 v40,9 54,9 | v54,10 54,9
GL1  (via drill 0.4)
  Top 0.254: RN31.5 110.2,15.2 v110.5,15.5 | T1.1 101.95,31.55 102.5,31 v102.5,30
  Bottom 0.254: v110.5,15.5 110.5,16 110.25,16.25 108.25,16.25 104,20.5 104,28.5 v102.5,30
GL2  (via drill 0.4)
  Top 0.254: RN31.6 109.4,15.4 v109.5,15.5 | T2.1 97.95,31.55 98.5,31 v98.5,30
  Bottom 0.254: v109.5,15.5 109.25,15.75 107.75,15.75 103.5,20 103.5,27.5 101,30 v98.5,30
GL3  (via drill 0.4)
  Top 0.254: RN60.7 43.6,15.4 v43.5,15.5 | T3.1 53.95,31.55 54.5,31 v54.5,30
  Bottom 0.254: v43.5,15.5 44,16 54.5,16 56,17.5 56,28.5 v54.5,30
GL4  (via drill 0.4)
  Top 0.254: RN60.8 42.8,15.2 v42.5,15.5 | v50.5,30 50.5,31 49.95,31.55 T4.1
  Bottom 0.254: v42.5,15.5 42.5,16 43,16.5 54,16.5 55.5,18 55.5,27.5 53,30 v50.5,30
GND  (via drill 0.4)
  Top 0.406: C6.2 47.5,5.35 47.5,5
  other vias: 102,27 102,19 96,19 96,27 123,21 123,31 105.5,12.5 118,12.5 130.5,12.5 80.5,12.5 60.5,12.5 35.5,12.5 23,12.5 10.5,12.5 48.5,4.5 54,27 54,19 48,19 48,27 27,21 27,31 142,40 140,40 138,40 136,40 134,40 132,40 130,40 128,40 126,40 124,40 122,40 120,40 118,40 116,40 114,40 112,40 110,40 108,40 106,40 104,40 102,40 100,40 98,40 96,40 94,40 92,40 90,40 88,40 86,40 84,40 82,40 80,40 78,40 76,40 74,40 72,40 70,40 68,40 66,40 64,40 62,40 60,40 58,40 56,40 54,40 52,40 50,40 48,40 46,40 44,40 42,40 40,40 38,40 36,40 34,40 32,40 30,40 28,40 26,40 24,40 22,40 20,40 18,40 16,40 14,40 12,40 10,40 8,40 142,1 140,1 138,1 136,1 134,1 132,1 130,1 128,1 126,1 124,1 122,1 120,1 118,1 116,1 114,1 112,1 110,1 108,1 106,1 104,1 102,1 100,1 98,1 96,1 94,1 92,1 90,1 88,1 86,1 84,1 82,1 80,1 78,1 76,1 74,1 72,1 70,1 68,1 66,1 64,1 62,1 60,1 58,1 56,1 54,1 52,1 50,1 48,1 46,1 44,1 42,1 40,1 38,1 36,1 34,1 32,1 30,1 28,1 26,1 24,1 22,1 20,1 18,1 16,1 14,1 12,1 10,1 8,1 148,34 148,32 148,30 148,28 148,26 148,24 148,22 148,20 148,18 148,16 148,14 148,12 148,10 148,8 2,34 2,32 2,30 2,28 2,26 2,24 2,22 2,20 2,18 2,16 2,14 2,12 2,10 2,8 72.5,12.5 48,13 92.5,12.5
  pour Top (isolate 0.61): 147,0 150,3 150,39 148,42 3,42 0,39 0,3 3,0
  pour Bottom (isolate 0.61): 147,0 150,3 150,39.5 147,42 3,42 0,39 0,3 3,0
MOSI  (via drill 0.4)
  Top 0.254: IC1.14 136.91,8.4 v137,8.5 | JP1.4 50,6 52,8 54,8 v56,10
  Bottom 0.254: v56,10 135.5,10 v137,8.5
N1_0
  Top 0.254: N1.K0 131.73,25.97 130.5,27.2 130.5,28.7 129.2,30 T10.3
N1_1
  Top 0.254: N1.K1 134.27,32.77 134.9,33.4 T11.3
N1_2
  Top 0.254: N1.K2 134.27,28.37 138.5,32.6 T12.3
N1_3
  Top 0.254: N1.K3 134.27,25.97 135.5,27.2 135.5,28.7 136.8,30 T13.3
N1_4
  Top 0.254: N1.K4 134.27,23.27 135.5,24.5 135.5,26 136.1,26.6 138.7,26.6 138.8,26.5 T14.3 139,26.5
N1_5
  Top 0.254: N1.K5 134.27,20.77 135.5,22 135.5,23.5 136.1,24.1 137.6,24.1 138.2,23.5 138.2,20.4 138.6,20 T15.3
N1_6
  Top 0.254: N1.K6 131.73,20.77 130.5,22 130.5,23.5 129.9,24.1 128.4,24.1 127.8,23.5 127.8,20.4 127.4,20 T16.3
N1_7
  Top 0.254: N1.K7 131.73,23.27 130.5,24.5 130.5,26 129.9,26.6 127.6,26.6 127.1,26.1 T17.3
N1_8
  Top 0.254: N1.K8 131.73,32.67 T18.3
N1_9
  Top 0.254: N1.K9 131.73,28.37 127.5,32.6 T19.3
N1_PR
  Top 0.254: N1.PR 137.4,25.4 139.65,23.15 R11.2
N2_0
  Top 0.254: N2.K0 111.73,25.97 110.5,27.2 110.5,28.7 109.2,30 T20.3
N2_1
  Top 0.254: N2.K1 114.27,32.67 T21.3
N2_2
  Top 0.254: N2.K2 114.27,28.37 118.5,32.6 T22.3
N2_3
  Top 0.254: N2.K3 114.27,25.97 115.5,27.2 115.5,28.7 116.8,30 T23.3
N2_4
  Top 0.254: N2.K4 114.27,23.27 115.5,24.5 115.5,26 116.1,26.6 118.8,26.6 T24.3
N2_5
  Top 0.254: N2.K5 114.27,20.77 115.5,22 115.5,23.6 116,24.1 117.6,24.1 118.2,23.5 118.2,20.5 118.7,20 T25.3
N2_6
  Top 0.254: N2.K6 111.73,20.77 110.5,22 110.5,23.5 109.9,24.1 108.4,24.1 107.8,23.5 107.8,20.4 107.5,20 T26.3
N2_7
  Top 0.254: N2.K7 111.73,23.27 110.5,24.5 110.5,26.1 110,26.6 107.5,26.6 107.1,26.2 T27.3
N2_8
  Top 0.254: N2.K8 111.73,32.67 T28.3
N2_9
  Top 0.254: N2.K9 111.73,28.37 107.5,32.6 T29.3
N3_0
  Top 0.254: N3.K0 83.73,25.97 82.5,27.2 82.5,28.7 81.2,30 T30.3
N3_1
  Top 0.254: N3.K1 86.27,32.67 T31.3
N3_2
  Top 0.254: N3.K2 86.27,28.37 90.5,32.6 T32.3
N3_3
  Top 0.254: N3.K3 86.27,25.97 87.5,27.2 87.5,28.7 88.8,30 T33.3
N3_4
  Top 0.254: N3.K4 86.27,23.27 87.5,24.5 87.5,26 88.1,26.6 90.8,26.6 T34.3
N3_5
  Top 0.254: N3.K5 86.27,20.77 87.5,22 87.5,23.5 88.1,24.1 89.6,24.1 90.2,23.5 90.2,20.7 T35.3
N3_6
  Top 0.254: N3.K6 83.73,20.77 82.5,22 82.5,23.6 82,24.1 80.3,24.1 79.8,23.6 79.8,20.7 T36.3
N3_7
  Top 0.254: N3.K7 83.73,23.27 82.5,24.5 82.5,26.1 82,26.6 79.5,26.6 79.1,26.2 T37.3
N3_8
  Top 0.254: N3.K8 83.73,32.67 T38.3
N3_9
  Top 0.254: N3.K9 83.73,28.37 79.5,32.6 T39.3
N$1
  Top 0.305: R2.1 GL2.1
N$2
  Top 0.305: R3.1 GL3.1
N$3
  Top 0.305: R4.1 GL4.1
N$4
  Top 0.254: N1.A1 136.81,19.81 135.8,18.8 130.7,18.8 129.65,19.85 R10.1 129.5,22.5 129.19,22.81 N1.A2
N$5
  Top 0.305: GL2.2 98,27.5 97,28.5 T2.3
N$6
  Top 0.305: GL1.2 100,27.5 101,28.5 T1.3
N$7
  Top 0.305: GL4.2 50,27.5 49,28.5 T4.3
N$8
  Top 0.305: GL3.2 52,27.5 53,28.5 T3.3
N$9
  Top 0.254: N2.A1 116.81,19.81 115.8,18.8 110.7,18.8 109.65,19.85 R20.1 109.5,22.5 109.19,22.81 N2.A2
N$10  (via drill 0.4)
  Top 0.254: IC1.9 130.56,6.05 v131,6.5 | v125,6.5 124.41,5.91 IC2.14
  Bottom 0.254: v131,6.5 130.5,7 125.5,7 v125,6.5
N$11  (via drill 0.4)
  Top 0.254: IC3.14 111.91,5.91 v112.5,6.5 | IC2.9 118.06,6.05 v118.5,6.5
  Bottom 0.254: v112.5,6.5 113,7 118,7 v118.5,6.5
N$12  (via drill 0.4)
  Top 0.254: IC3.9 105.56,6.05 v106,6.5 | v87.5,6.5 86.91,5.91 IC4.14
  Bottom 0.254: v106,6.5 105.5,7 88,7 v87.5,6.5
N$13
  Top 0.254: N3.A2 81.5,22.55 R30.1 81.65,19.85 82.65,18.85 82.65,18.8 87.8,18.8 88.81,19.81 N3.A1
N$14
  Top 0.254: N4.A2 61.5,22.55 R40.1 61.75,19.85 62.8,18.8 67.8,18.8 68.81,19.81 N4.A1
N$15
  Top 0.254: N5.A2 33.5,22.55 R50.1 33.75,19.85 34.8,18.8 39.8,18.8 40.81,19.81 N5.A1
N$16  (via drill 0.4)
  Top 0.254: IC4.9 80.56,6.05 v81,6.5 | IC5.14 66.91,5.91 v67.5,6.5
  Bottom 0.254: v81,6.5 80.5,7 68,7 v67.5,6.5
N$17
  Top 0.254: N6.A2 13.5,22.55 R60.1 13.75,19.85 14.9,18.7 19.7,18.7 20.81,19.81 N6.A1
N$18  (via drill 0.4)
  Top 0.254: IC5.9 60.55,6.05 v61,6.5 | v42.5,6.5 41.91,5.91 IC6.14
  Bottom 0.254: v61,6.5 60.5,7 54,7 53,6 46,6 45,7 43,7 v42.5,6.5
N$19  (via drill 0.4)
  Top 0.254: IC7.14 29.41,5.91 v30,6.5 | IC6.9 35.55,6.05 v36,6.5
  Bottom 0.254: v36,6.5 35.5,7 30.5,7 v30,6.5
N$20  (via drill 0.4)
  Top 0.254: IC7.9 23.05,6.05 v23.5,6.5 | IC8.14 16.91,5.91 v17.5,6.5
  Bottom 0.254: v23.5,6.5 23,7 18,7 v17.5,6.5
N$21
  Top 0.305: GL1.1 R1.1
N$25
  Top 0.254: N6.PR 21.25,25.4 R61.2
N$26
  Top 0.254: N3.PR 89.25,25.4 R31.2
N$27
  Top 0.254: N2.PR 117.25,25.4 R21.2
N$28
  Top 0.254: N5.PR 41.25,25.4 R51.2
N$29
  Top 0.254: N4.PR 69.25,25.4 R41.2
RCK  (via drill 0.4)
  Top 0.254: IC1.12 134.37,7.63 v134,8 | IC2.12 121.86,7.63 v121.5,8 | IC3.12 109.36,7.63 v109,8 | IC4.12 84.36,7.63 v84,8 | IC5.12 64.36,7.63 v64,8 | IC6.12 39.37,7.63 v39,8 | IC7.12 26.86,7.63 v26.5,8 | IC8.12 14.37,7.63 v14,8 | JP1.5 47.46,8.04 v47.5,8
  Bottom 0.254: v134,8 133.5,8.5 123.5,8.5 123,8 v121.5,8 121,8.5 111,8.5 110.5,8 v109,8 108.5,8.5 86,8.5 85.5,8 v84,8 83.5,8.5 66,8.5 65.5,8 v64,8 63.5,8.5 47.5,8.5 | v14,8 15.5,8 16,8.5 26,8.5 v26.5,8 28,8 28.5,8.5 38.5,8.5 v39,8 40.5,8 41,8.5 47.5,8.5 | v47.5,8 47.5,8.5
SCK  (via drill 0.4)
  Top 0.254: IC1.11 133.09,7.41 v133,7.5 | IC2.11 120.59,7.41 v120.5,7.5 | IC3.11 108.09,7.41 v108,7.5 | IC4.11 83.09,7.41 v83,7.5 | IC5.11 63.09,7.41 v63,7.5 | IC6.11 38.09,7.41 v38,7.5 | IC7.11 25.59,7.41 v25.5,7.5 | IC8.11 13.1,7.41 v13,7.5 | JP1.3 v50,7.5
  Bottom 0.254: v133,7.5 132.5,8 124,8 123,7 121,7 v120.5,7.5 120,8 111.5,8 110.5,7 108.5,7 v108,7.5 107.5,8 86.5,8 85.5,7 83.5,7 v83,7.5 82.5,8 66.5,8 65.5,7 63.5,7 v63,7.5 62.5,8 50.5,8 v50,7.5 49.5,7 47,7 46,8 41.5,8 40.5,7 38.5,7 v38,7.5 37.5,8 29,8 28,7 26,7 v25.5,7.5 25,8 16.5,8 15.5,7 13.5,7 v13,7.5
SCL  (via drill 0.4)
  Top 0.254: IC1.10 131.82,6.83 v132,7 | IC2.10 119.33,6.83 v119.5,7 | IC3.10 106.83,6.83 v107,7 | IC4.10 81.83,6.83 v82,7 | IC5.10 61.83,6.83 v62,7 | IC6.10 36.83,6.83 v37,7 | IC7.10 24.32,6.83 v24.5,7 | IC8.10 11.82,6.83 v12,7 | JP1.2 52.54,6.96 v52.5,7
  Bottom 0.254: v132,7 131.5,7.5 124.5,7.5 123.5,6.5 120,6.5 v119.5,7 119,7.5 112,7.5 111,6.5 107.5,6.5 v107,7 106.5,7.5 87,7.5 86,6.5 82.5,6.5 v82,7 81.5,7.5 67,7.5 66,6.5 62.5,6.5 v62,7 61.5,7.5 53,7.5 v52.5,7 52,6.5 46.5,6.5 45.5,7.5 42,7.5 41,6.5 37.5,6.5 v37,7 36.5,7.5 29.5,7.5 28.5,6.5 25,6.5 v24.5,7 24,7.5 17,7.5 16,6.5 12.5,6.5 v12,7
VDD  (2 unrouted)
  Top 0.406: R10.2 129.5,17 109.5,17 | 109.5,18 R20.2 109.5,17 | 99,17 102.5,17 | 102.5,17 109.5,17 | 99,17 81.5,17 | 81.5,17 61.5,17 | R30.2 81.5,17 | R40.2 61.5,17 | 61.5,17 51,17 | 51,17 33.5,17 | 33.5,17 14,17 13.5,17.5 R60.2 | R50.2 33.5,17 | R1.2 99,19.65 | 99,19.65 98.15,19.65 98,19.5 | 99,17 99,19.65 | R3.2 51,19.65 | 51,19.65 50.15,19.65 50,19.5 | 51,17 51,19.65 | JP2.1 102.5,10.04 102.5,17